# Altium PCB analogtestboard.PCBDOC (part 1 of 2)
Units mil, origin at the board's own origin, x right, y up, seen from the top; angles counter-clockwise.
Board outline 5890 x 8500 mil, 4 copper layers (Top Layer, Internal Plane 1, Internal Plane 2, Bottom Layer); 292 components, 170 nets, 943 pads, 238 vias.
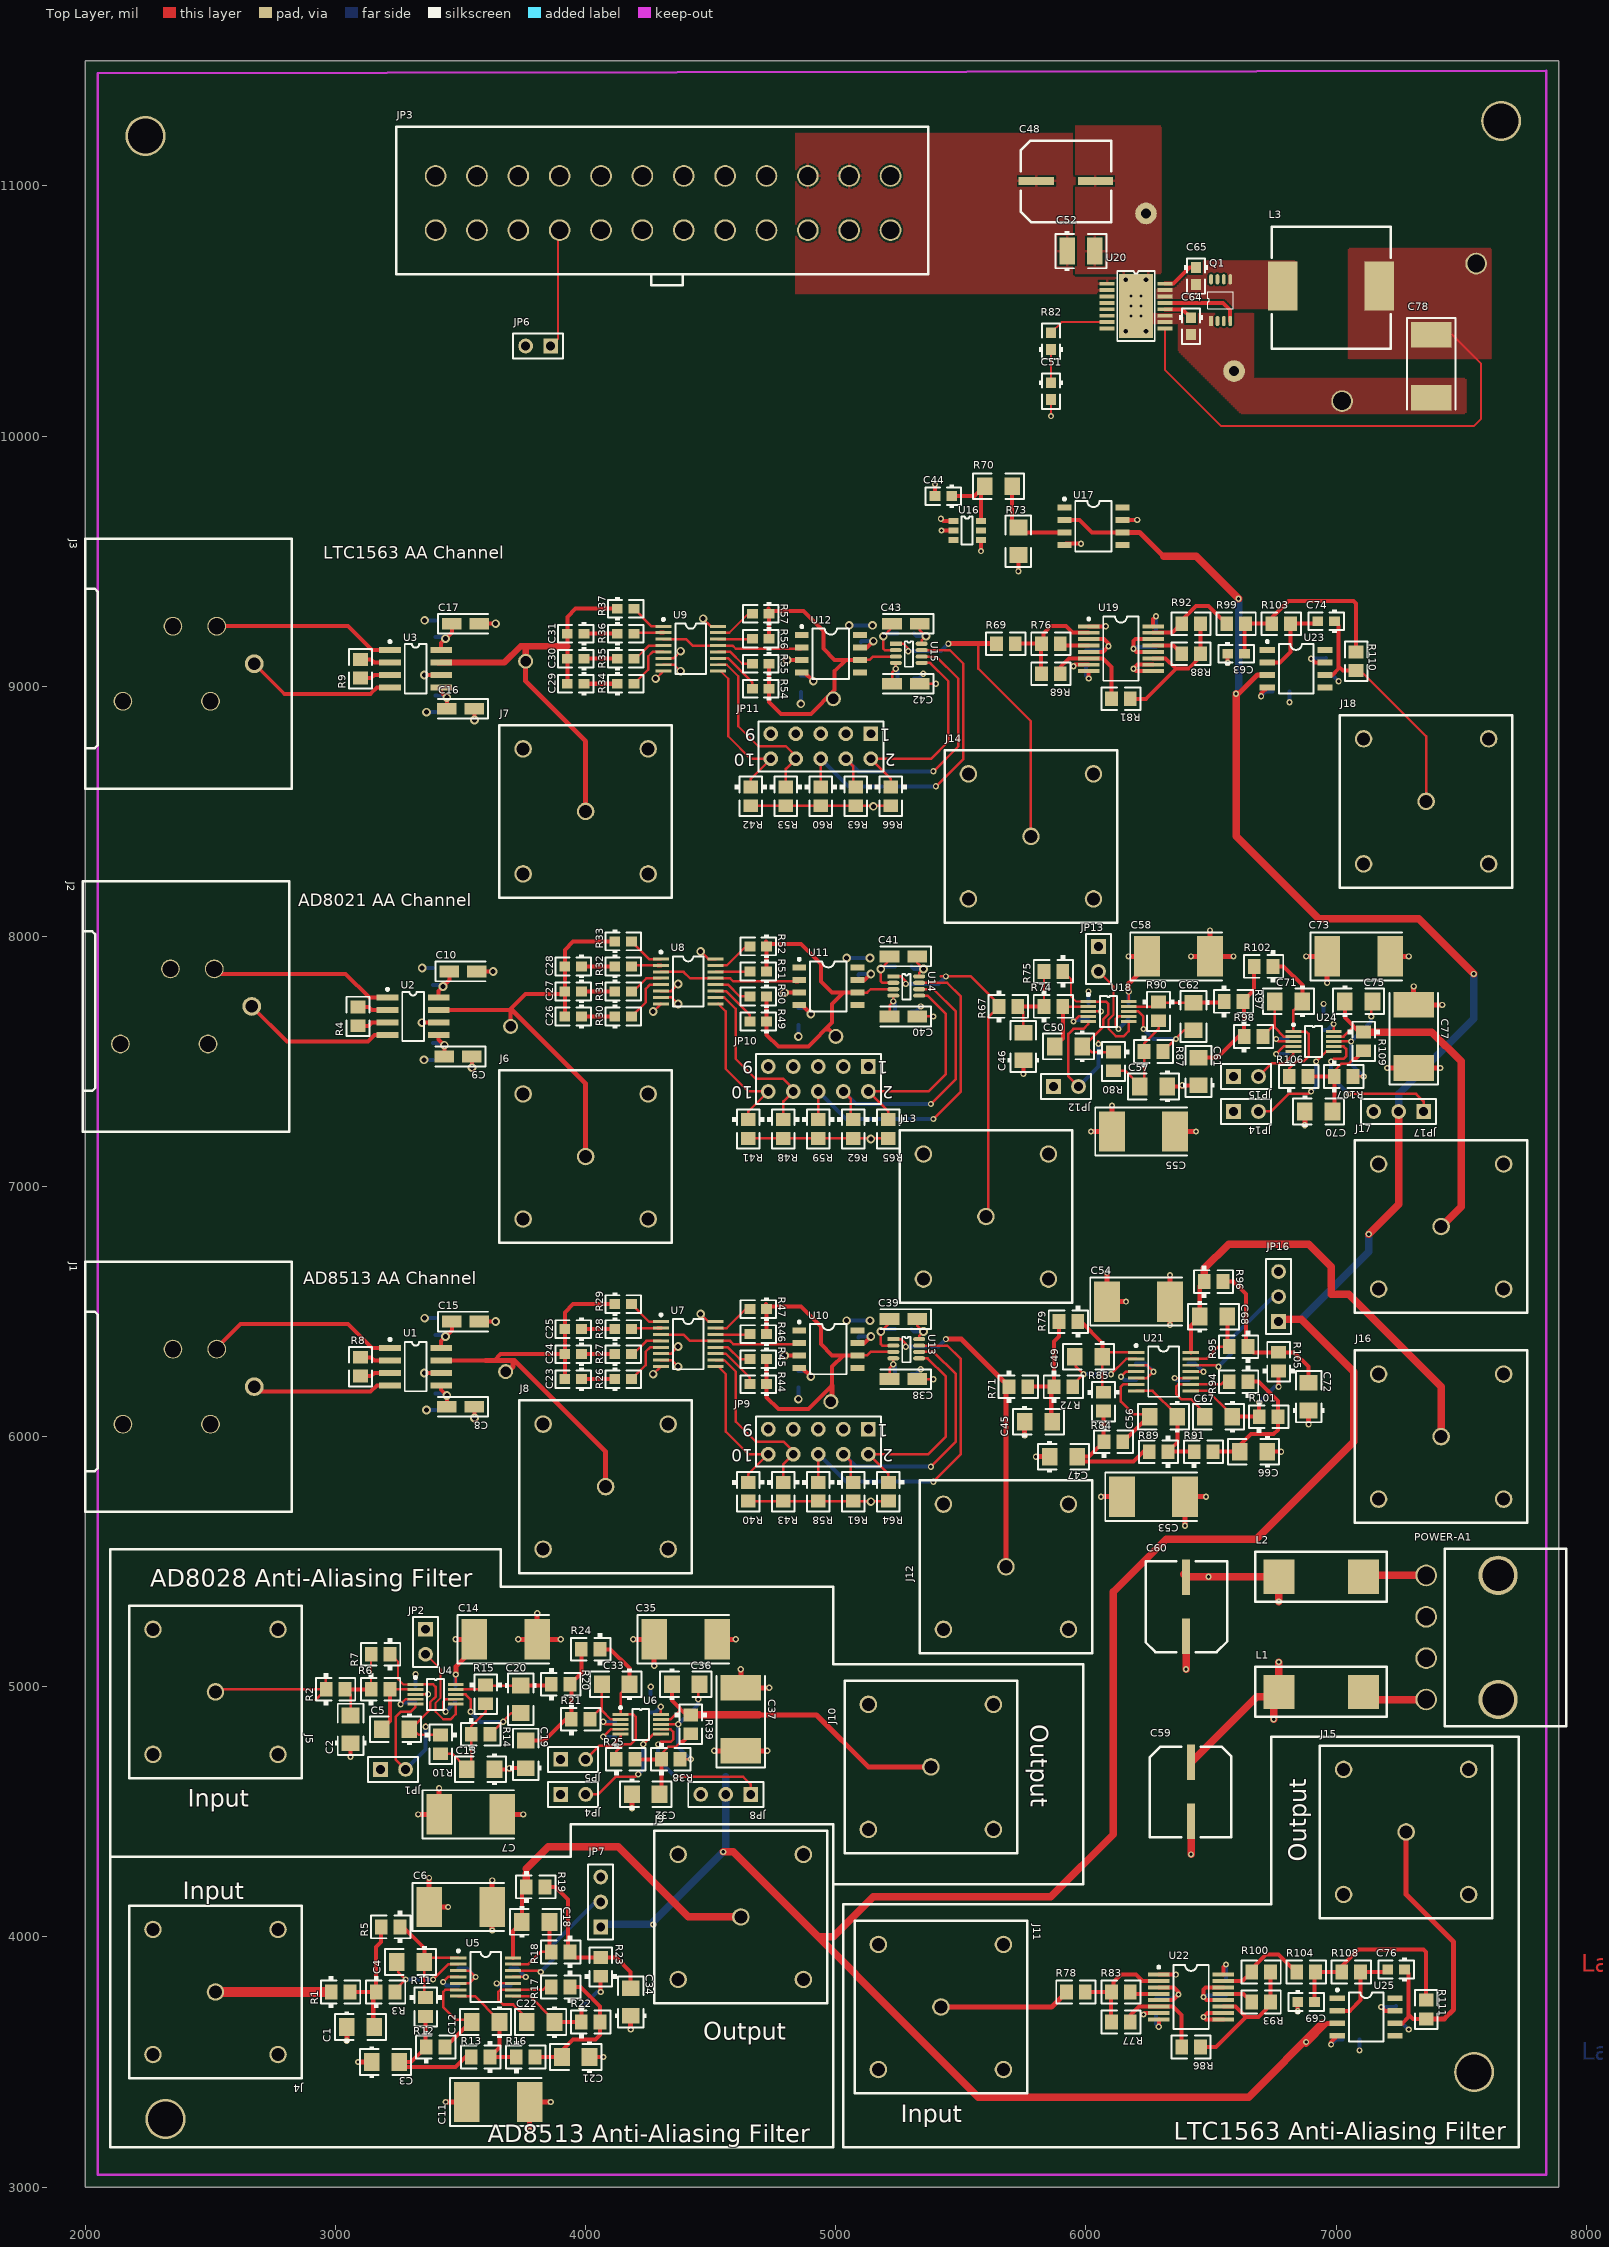
[diagram p0: Top Layer view]
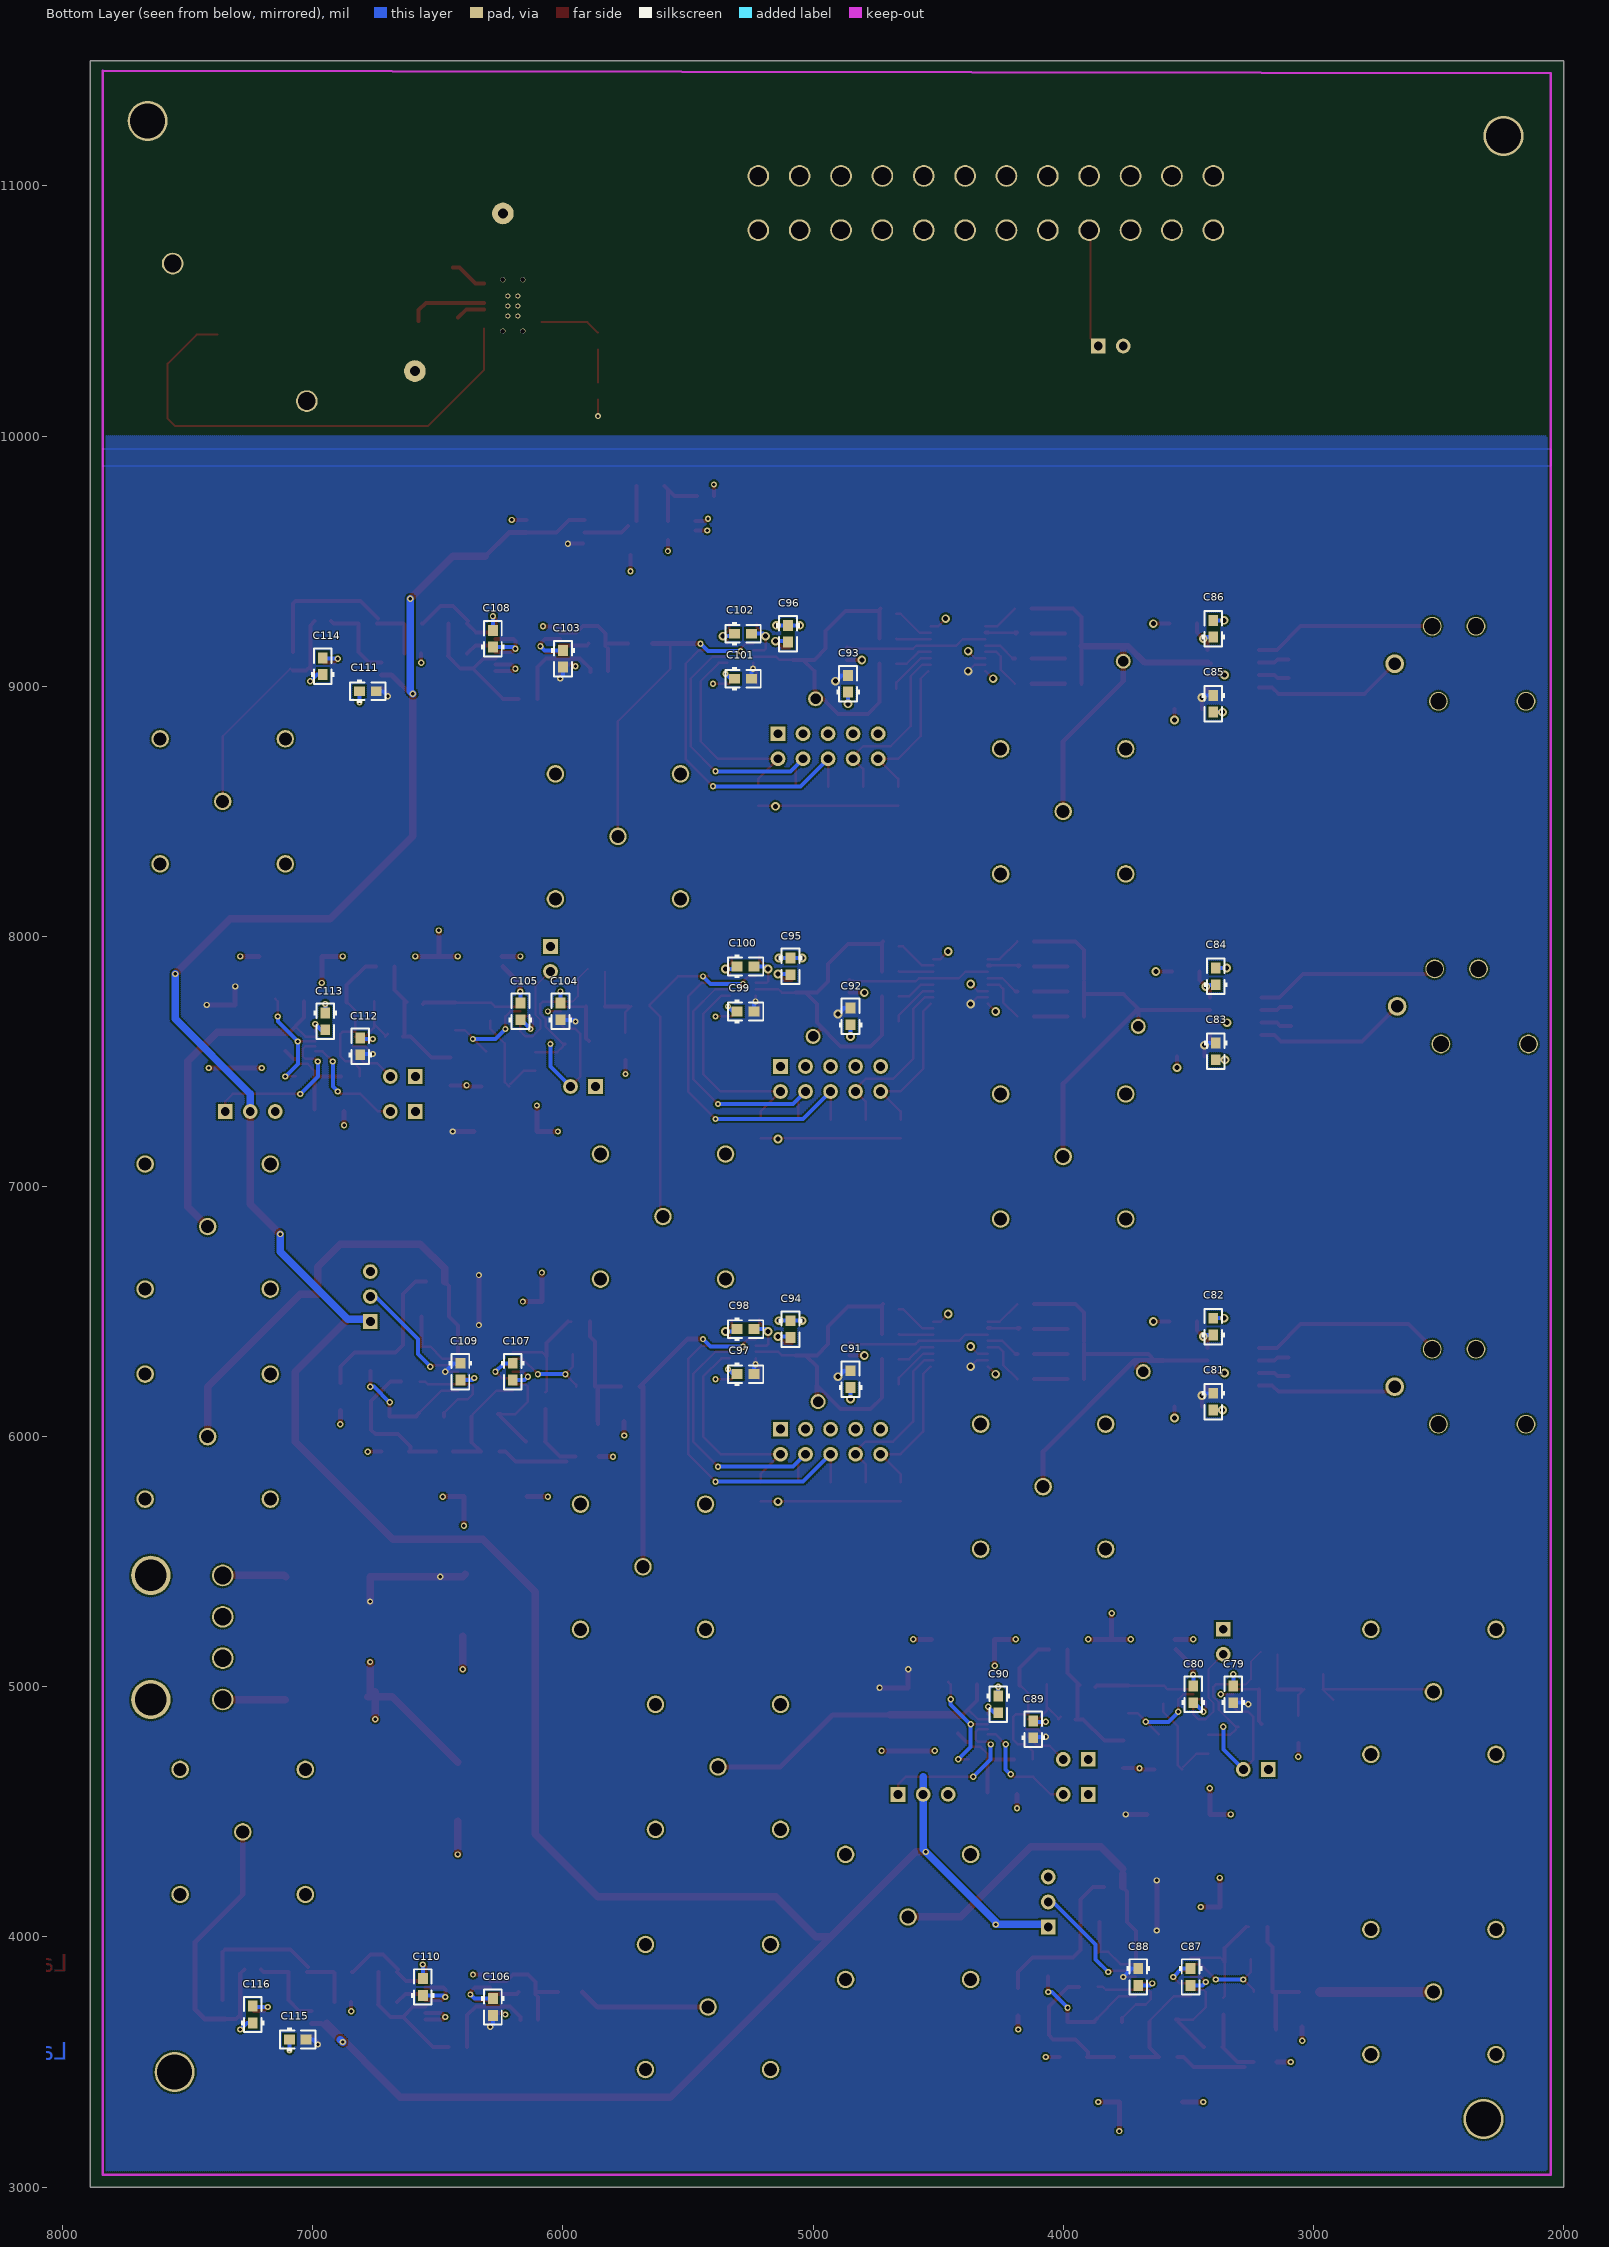
[diagram p1: Bottom Layer view, seen from below]
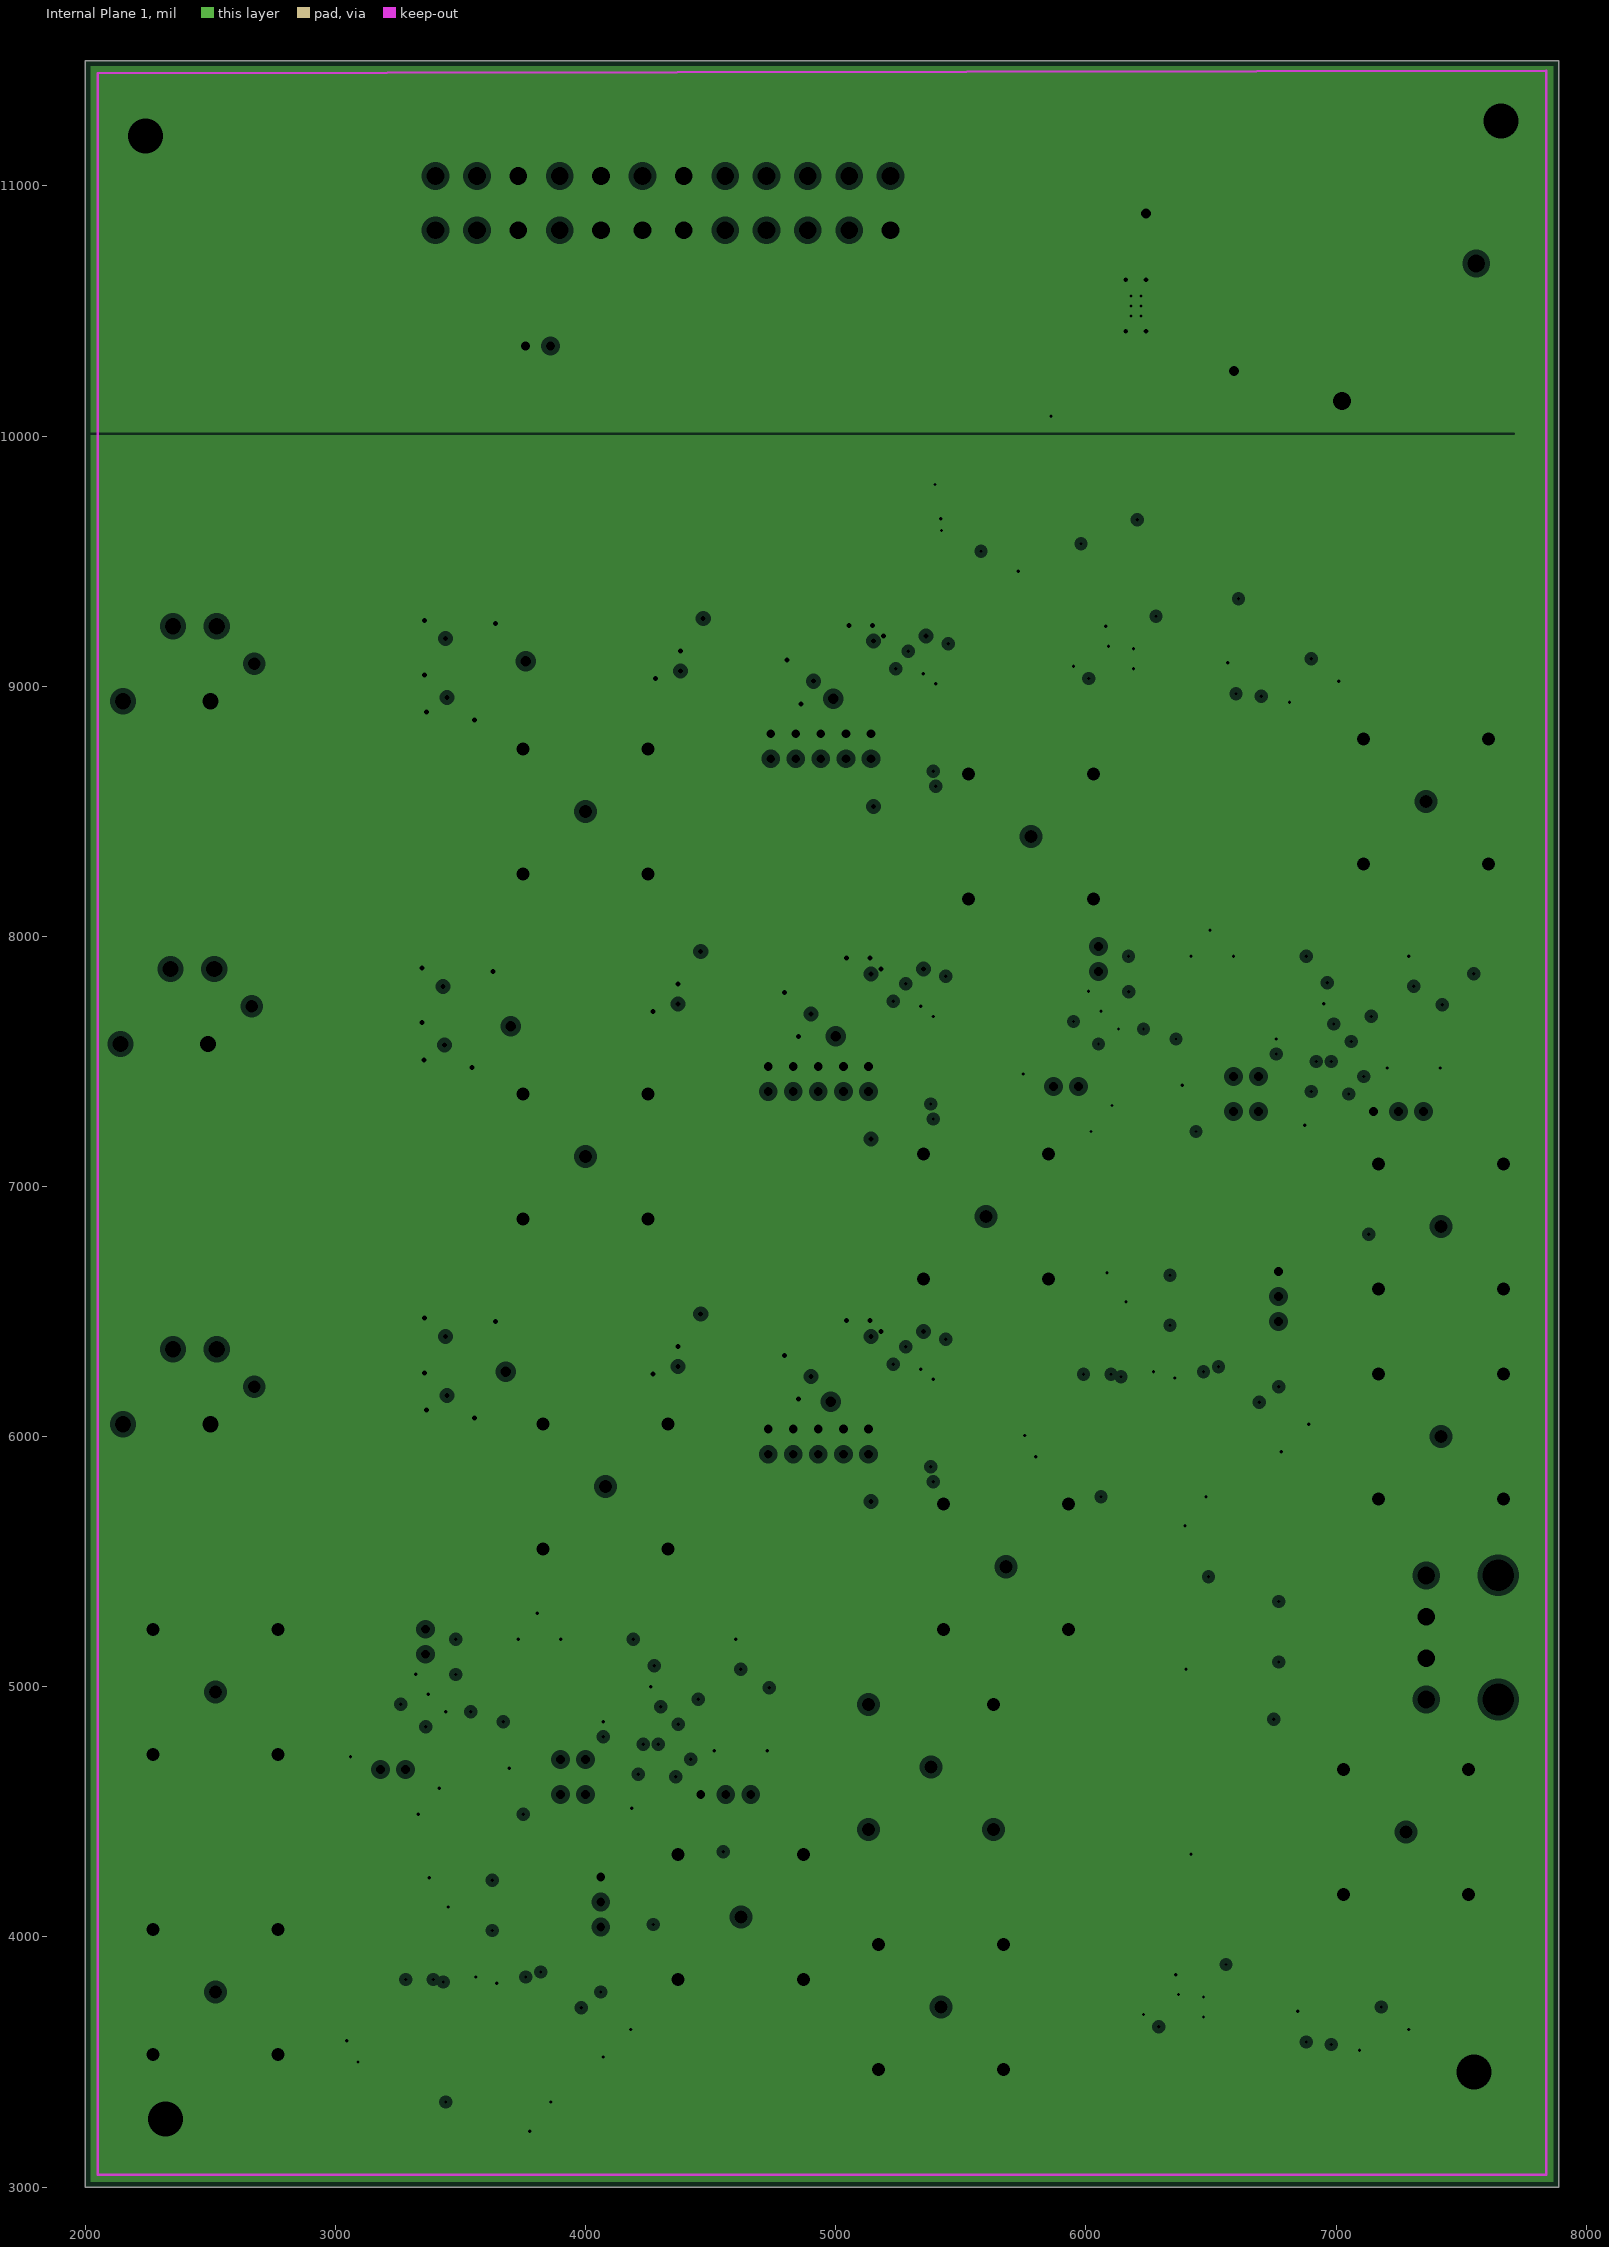
[diagram p2: Internal Plane 1, clearances drawn from the general rule]
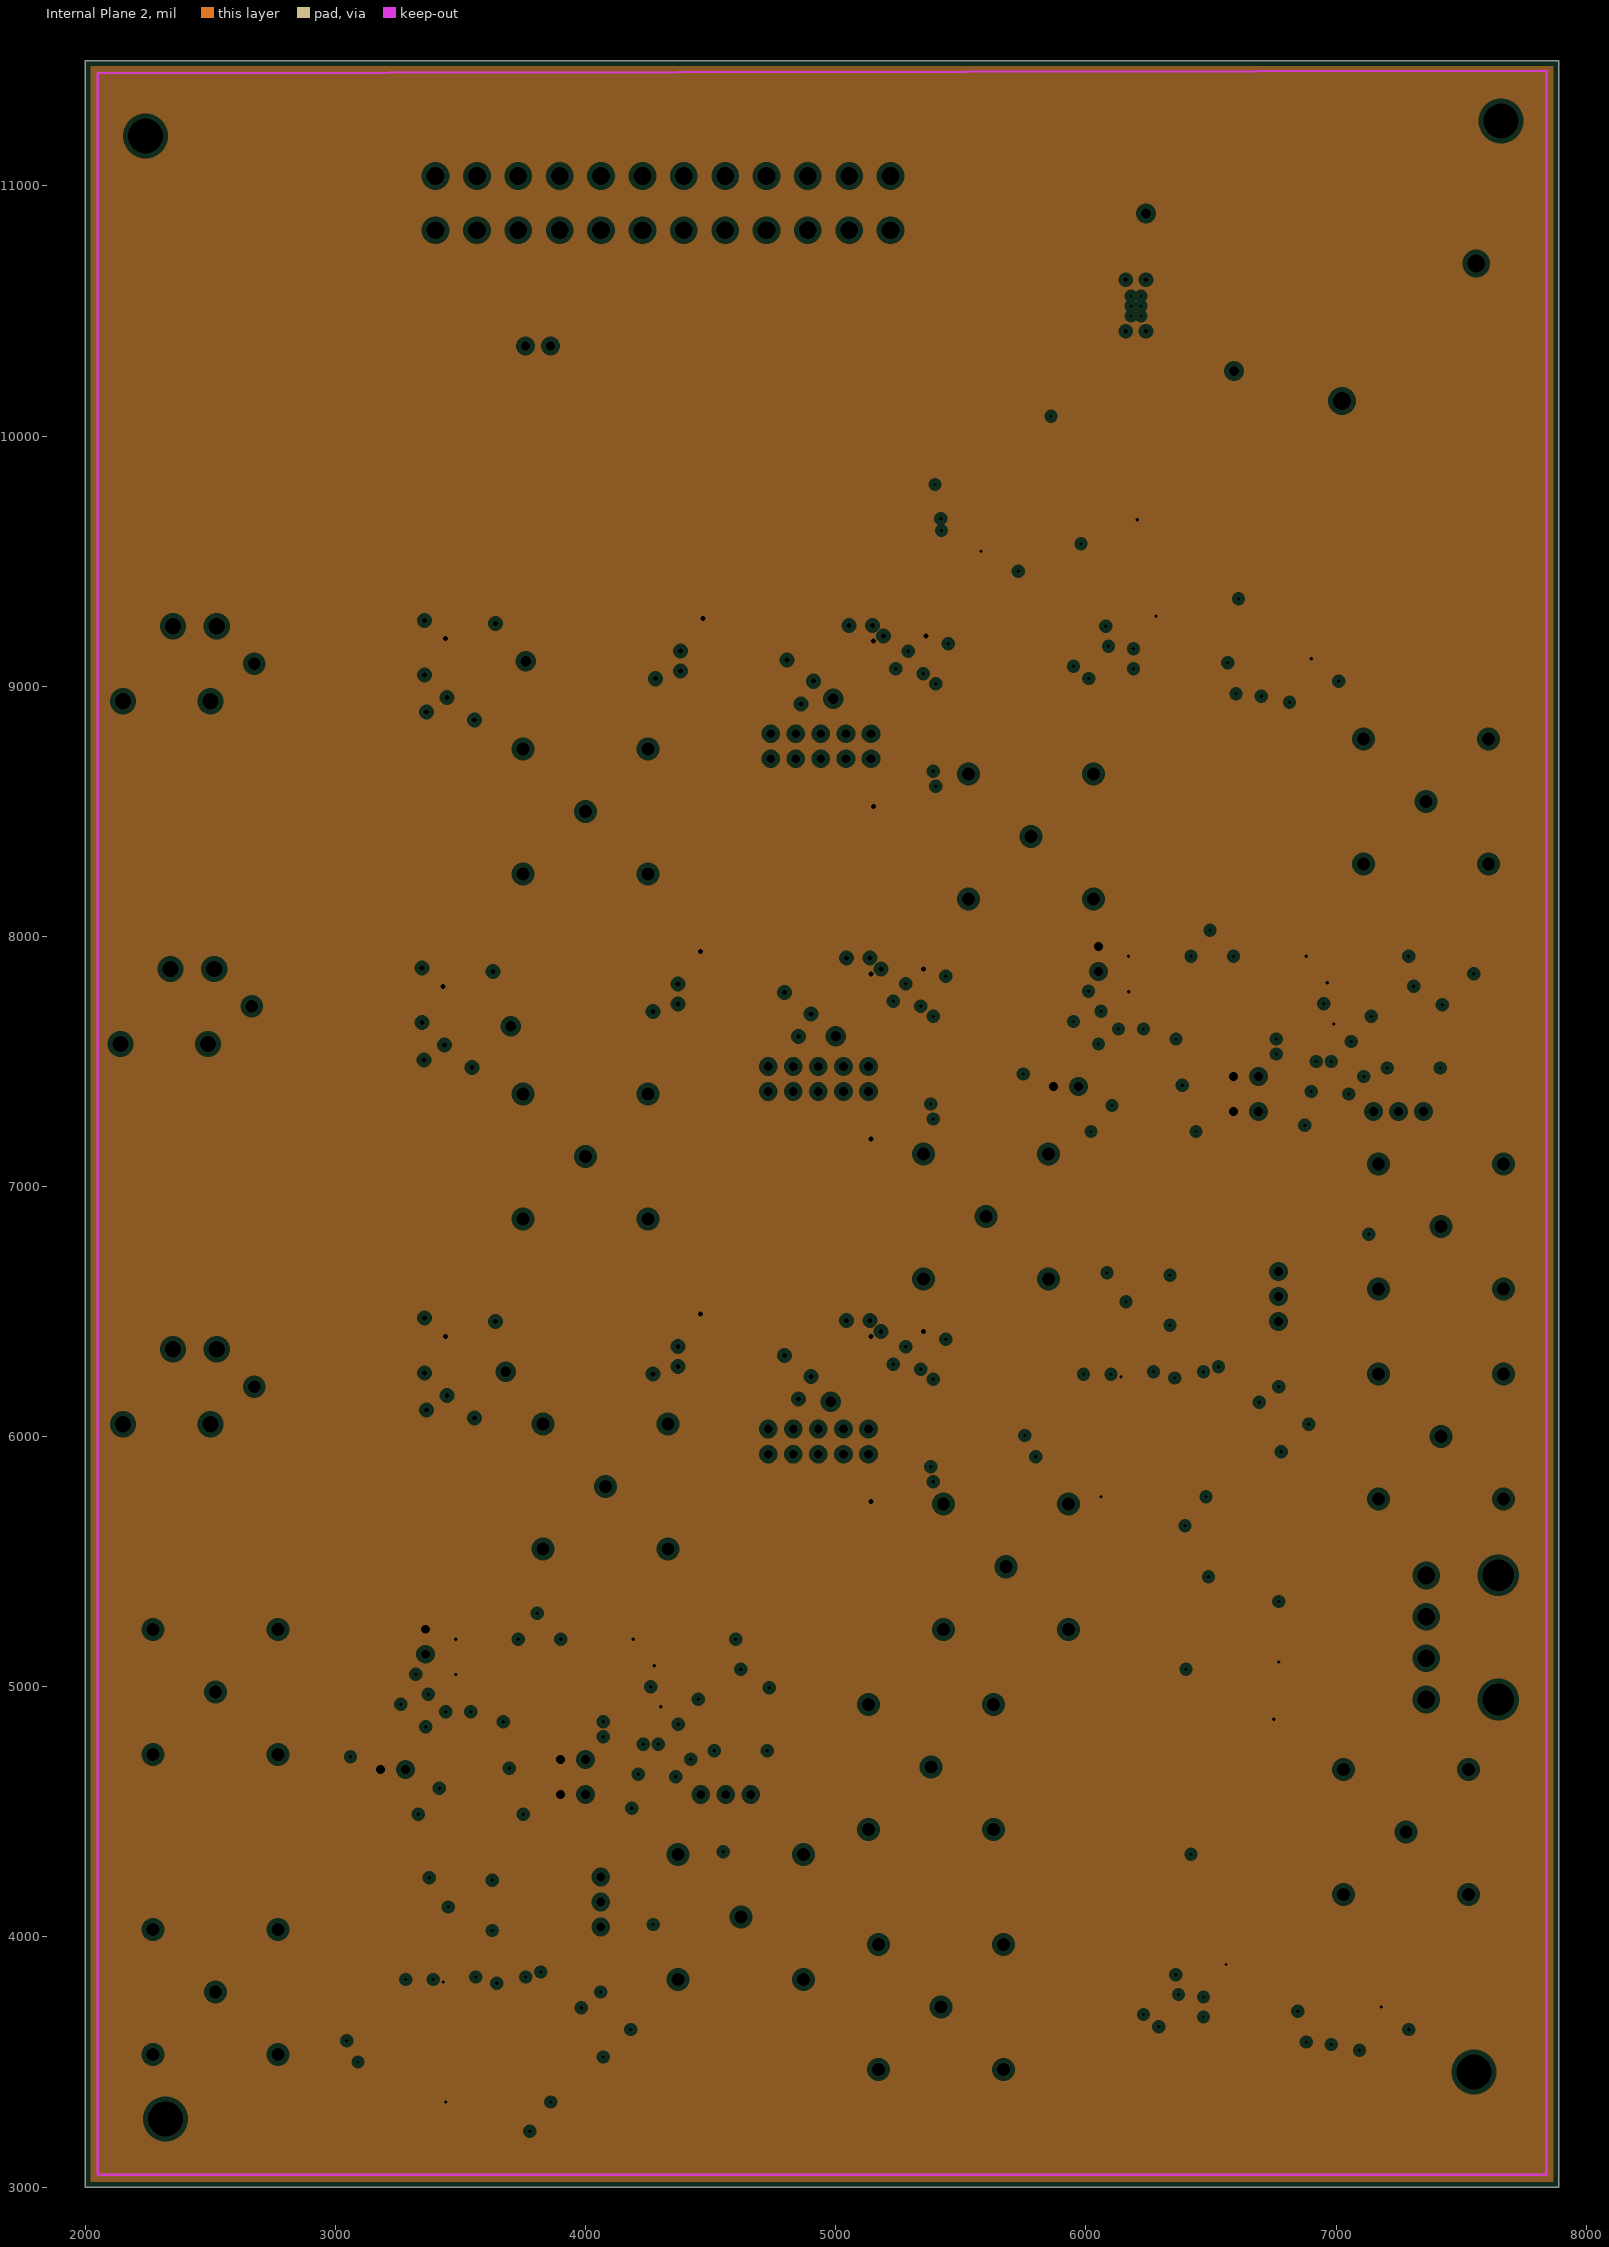
[diagram p3: Internal Plane 2, clearances drawn from the general rule]

## Layer stack, top to bottom
Top Layer: signal copper 1.4
Dielectric: core 12.6, FR-4, Dk 4.8
Internal Plane 1: plane copper 1.4, net GND
Dielectric: prepreg 12.6, FR-4, Dk 4.8
Internal Plane 2: plane copper 1.4, net AVDD
Dielectric: core 12.6, FR-4, Dk 4.8
Bottom Layer: signal copper 1.4

## Board outline
2000,3000 7890,3000 7890,11500 2000,11500

## Design rules (kind name [scope] priority, off if disabled: settings)
Clearance [All] p1: gap=7
ComponentClearance [All] p1: gap=10 collisioncheckmode=0
HoleSize [All] p1: absolutevalues=TRUE maxlimit=180 minlimit=13.5 maxpercent=80.000 minpercent=20.000
PlaneClearance [All] p1: clearance=20
PlaneConnect [All] p1: planeconnectstyle=Relief reliefexpansion=20 reliefentries=4 reliefconductorwidth=10 reliefairgap=10
PolygonConnect [All] p1: connectstyle=Direct reliefconductorwidth=30 reliefentries=4 polygonreliefangle="45 Angle"
RoomDefinition power [InComponentClass('power')] p1: confinementstyle=ConfineIn formatcopy=TRUE outline 3090,10050 7780,10050 7780,11370 3090,11370
RoomDefinition aa80281 [InComponentClass('aa80281')] p2: confinementstyle=ConfineIn formatcopy=TRUE outline 5590,7100 7470,7100 7470,8050 5590,8050
RoomDefinition AA85131 [InComponentClass('AA85131')] p3: confinementstyle=ConfineIn formatcopy=TRUE outline 5600,5630 7010,5630 7010,6730 5600,6730
RoomDefinition AA85132 [InComponentClass('AA85132')] p4: confinementstyle=ConfineIn formatcopy=TRUE outline 2890,3210 4300,3210 4300,4310 2890,4310
RoomDefinition PGA1 [InComponentClass('PGA1')] p5: confinementstyle=ConfineIn formatcopy=TRUE outline 3820,8440 5550,8440 5550,9370 3820,9370
RoomDefinition PGA2 [InComponentClass('PGA2')] p6: confinementstyle=ConfineIn formatcopy=TRUE outline 3810,5660 5540,5660 5540,6590 3810,6590
RoomDefinition PGA3 [InComponentClass('PGA3')] p7: confinementstyle=ConfineIn formatcopy=TRUE outline 3810,7110 5540,7110 5540,8040 3810,8040
RoomDefinition aa80282 [InComponentClass('aa80282')] p8: confinementstyle=ConfineIn formatcopy=TRUE outline 2900,4370 4780,4370 4780,5320 2900,5320
RoomDefinition aafilter1 [InComponentClass('aafilter1')] p9: confinementstyle=ConfineIn formatcopy=TRUE outline 5570,8850 7160,8850 7160,9360 5570,9360
RoomDefinition aafilter2 [InComponentClass('aafilter2')] p10: confinementstyle=ConfineIn formatcopy=TRUE outline 5850,3460 7440,3460 7440,3970 5850,3970
RoomDefinition input1 [InComponentClass('input1')] p11: confinementstyle=ConfineIn formatcopy=TRUE outline 3000,8790 3780,8790 3780,9330 3000,9330
RoomDefinition input2 [InComponentClass('input2')] p12: confinementstyle=ConfineIn formatcopy=TRUE outline 2990,7400 3770,7400 3770,7940 2990,7940
RoomDefinition input3 [InComponentClass('input3')] p13: confinementstyle=ConfineIn formatcopy=TRUE outline 3000,6000 3780,6000 3780,6540 3000,6540
RoomDefinition main [InComponentClass('main')] p14: confinementstyle=ConfineIn formatcopy=TRUE outline 7940,3120 8420,3120 8420,4260 7940,4260
RoutingLayers [All] p1: top layer=Horizontal bottom layer=Vertical
RoutingVias [All] p1: holewidth=13.5 width=25 viastyle="Through Hole" minholewidth=13.5 minwidth=25 maxholewidth=28 maxwidth=50
SolderMaskExpansion [All] p1: expansion=4
TestPointUsage [All] p1: valid=0 allowmultiple=FALSE
Testpoint [All] p1: side=15 testpointundercomponent=TRUE minsize=40 maxsize=100 preferedsize=60 minholesize=0 maxholesize=40 preferedholesize=32 testpointgrid=1 style=1023 order=-539222988
Width [All] p1: maxlimit=100 minlimit=8 preferedwidth=8 bottomlayer_prefwidth=30 minimp=50.000000 maximp=50.000000 favimp=50.000000
13 further rules are at their usual default settings.

## Classes and differential pairs
component class power: C48 C51 C52 C64 C65 C78 JP3 JP6 L3 Q1 R82 U20
channel class input: input1 input2 input3
channel class aafilter: aafilter1 aafilter2
channel class aa8028: aa80281 aa80282
channel class PGA: PGA1 PGA2 PGA3
channel class AA8513: AA85131 AA85132
component class main: C44 C52 C54 C55 C59 C60 J1 J2 J3 J4 J5 J6 J7 J8 J9 J10 J11 J12 J13 J14 J15 J16 J17 J18 L1 L2 POWER-A1 R70 R73 U16 U17
component class input3: C8 C15 C81 C82 R8 U1
component class input2: C9 C10 C83 C84 R4 U2
component class input1: C16 C17 C85 C86 R9 U3
component class aafilter2: C69 C76 C106 C110 C115 C116 R77 R78 R83 R86 R93 R100 R104 R108 R111 U22 U25
component class aafilter1: C63 C74 C103 C108 C111 C114 R68 R69 R76 R81 R88 R92 R99 R103 R110 U19 U23
component class aa80282: C2 C5 C7 C13 C14 C19 C20 C32 C33 C35 C36 C37 C79 C80 C89 C90 JP1 JP2 JP4 JP5 JP8 R2 R6 R7 R10 R14 R15 R20 R21 R24 R25 R38 R39 U4 U6
component class aa80281: C46 C50 C55 C57 C58 C61 C62 C70 C71 C73 C75 C77 C104 C105 C112 C113 JP12 JP13 JP14 JP15 JP17 R67 R74 R75 R80 R87 R90 R97 R98 R102 R106 R107 R109 U18 U24
component class PGA3: C26 C27 C28 C40 C41 C92 C95 C99 C100 JP10 R30 R31 R32 R33 R41 R48 R49 R50 R51 R52 R59 R62 R65 U8 U11 U14
component class PGA2: C23 C24 C25 C38 C39 C91 C94 C97 C98 JP9 R26 R27 R28 R29 R40 R43 R44 R45 R46 R47 R58 R61 R64 U7 U10 U13
component class PGA1: C29 C30 C31 C42 C43 C93 C96 C101 C102 JP11 R34 R35 R36 R37 R42 R53 R54 R55 R56 R57 R60 R63 R66 U9 U12 U15
component class AA85132: C1 C3 C4 C6 C10_AA85132 C11 C12 C12_AA85132 C13_AA85132 C16_AA85132 C18 C21 C22 C34 C87 C88 JP7 R1 R3 R5 R11 R12 R13 R16 R17 R18 R19 R22 R23 U5
component class AA85131: C10_AA85131 C12_AA85131 C13_AA85131 C16_AA85131 C45 C47 C49 C53 C54 C56 C66 C67 C68 C72 C107 C109 JP16 R71 R72 R79 R84 R85 R89 R91 R94 R95 R96 R101 R105 U21

## Components (designator, comment, footprint, x,y, rotation, side; value= is the part's Value field where it differs from the comment)
C1 "Cap" CC3216-1206 3100,3640 r0 top (schematic designator C5)
C2 "Cap" CC3216-1206 3060,4830 r90 top (schematic designator C30)
C3 "Cap" CC3216-1206 3200,3500 r0 top (schematic designator C6)
C4 "Cap" CC3216-1206 3300,3900.01 r180 top (schematic designator C1)
C5 "Cap" CC3216-1206 3240,4830 r180 top (schematic designator C26)
C6 "Cap Pol1" TC7360-2924 3500,4120 r0 top (schematic designator C15)
C7 "Cap Pol1" TC7360-2924 3540,4490 r0 top (schematic designator C40)
C8 "Cap Pol3" TC3216-1206 3500,6120 r180 top (schematic designator C51)
C9 "Cap Pol3" TC3216-1206 3490,7520 r180 top (schematic designator C51)
C10 "Cap Pol3" TC3216-1206 3510,7860 r0 top (schematic designator C50)
C11 "Cap Pol1" TC7360-2924 3650,3340 r0 top (schematic designator C14)
C12 "Cap" CC3216-1206 3600,3660 r180 top (schematic designator C2)
C13 "Cap" CC3216-1206 3580,4670 r180 top (schematic designator C31)
C14 "Cap Pol1" TC7360-2924 3680,5190 r0 top (schematic designator C39)
C15 "Cap Pol3" TC3216-1206 3520,6460 r0 top (schematic designator C50)
C16 "Cap Pol3" TC3216-1206 3500,8910 r180 top (schematic designator C51)
C17 "Cap Pol3" TC3216-1206 3520,9250 r0 top (schematic designator C50)
C18 "Cap" CC3216-1206 3800,4060 r0 top (schematic designator C4)
C19 "Cap" CC3216-1206 3760,4730 r90 top (schematic designator C32)
C20 "Cap" CC3216-1206 3739.98,4950 r270 top (schematic designator C27)
C21 "Cap" CC3216-1206 3960,3520.01 r180 top (schematic designator C7)
C22 "Cap" CC3216-1206 3820,3660 r180 top (schematic designator C3)
C23 "Cap" CC1608-0603 3950,6230 r180 top (schematic designator C19)
C24 "Cap" CC1608-0603 3950,6330 r180 top (schematic designator C23)
C25 "Cap" CC1608-0603 3950,6430 r180 top (schematic designator C21)
C26 "Cap" CC1608-0603 3950,7680 r180 top (schematic designator C19)
C27 "Cap" CC1608-0603 3950,7780 r180 top (schematic designator C23)
C28 "Cap" CC1608-0603 3950,7880 r180 top (schematic designator C21)
C29 "Cap" CC1608-0603 3960,9010 r180 top (schematic designator C19)
C30 "Cap" CC1608-0603 3960,9110 r180 top (schematic designator C23)
C31 "Cap" CC1608-0603 3960,9210 r180 top (schematic designator C21)
C32 "Cap" CC3216-1206 4240,4570 r0 top (schematic designator C33)
C33 "Cap" CC3216-1206 4120,5010 r180 top (schematic designator C28)
C34 "Cap" CC3216-1206 4180,3740 r90 top (schematic designator C8)
C35 "Cap Pol1" TC7360-2924 4400,5190 r0 top (schematic designator C38)
C36 "Cap" CC3216-1206 4400,5010 r0 top (schematic designator C29)
C37 "Cap Pol1" TC7360-2924 4620,4870 r90 top (schematic designator C41)
C38 "Tantalum" TC3216-1206 5270,6230 r180 top (schematic designator C25)
C39 "Tantalum" TC3216-1206 5270,6470 r180 top (schematic designator C24)
C40 "Tantalum" TC3216-1206 5270,7680 r180 top (schematic designator C25)
C41 "Tantalum" TC3216-1206 5270,7920 r180 top (schematic designator C24)
C42 "Tantalum" TC3216-1206 5280,9010 r180 top (schematic designator C25)
C43 "Tantalum" TC3216-1206 5280,9250 r180 top (schematic designator C24)
C44 "Cap" CC1608-0603 5430,9760 r180 top (schematic designator C53)
C45 "Cap" CC3216-1206 5810,6060 r0 top (schematic designator C5)
C46 "Cap" CC3216-1206 5750,7560 r90 top (schematic designator C30)
C47 "Cap" CC3216-1206 5910,5920 r0 top (schematic designator C6)
C48 "EEVFK1C152Q" PanasonicE 5920,11020 r180 top (schematic designator C61)
C49 "Cap" CC3216-1206 6010,6320 r180 top (schematic designator C1)
C50 "Cap" CC3216-1206 5930,7560 r180 top (schematic designator C26)
C51 "Cap" CC1608-0603 5860,10180 r270 top (schematic designator C60)
C52 "C3225X5R1C106M" CC3225-1210 5980,10740 r0 top (schematic designator C62)
C53 "Cap Pol1" TC7360-2924 6270,5760 r0 top (schematic designator C14)
C54 "Cap Pol1" TC7360-2924 6210,6540 r0 top (schematic designator C15)
C55 "Cap Pol1" TC7360-2924 6230,7220 r0 top (schematic designator C40)
C56 "Cap" CC3216-1206 6310,6080 r180 top (schematic designator C2)
C57 "Cap" CC3216-1206 6270,7400 r180 top (schematic designator C31)
C58 "Cap Pol1" TC7360-2924 6370,7920 r0 top (schematic designator C39)
C59 "" PanasonicE 6420,4580 r90 top (schematic designator C56)
C60 "" PanasonicE 6400,5320 r270 top (schematic designator C57)
C61 "Cap" CC3216-1206 6450,7460 r90 top (schematic designator C32)
C62 "Cap" CC3216-1206 6429.98,7680 r270 top (schematic designator C27)
C63 "Cap" CC1608-0603 6600,9130 r0 top (schematic designator C45)
C64 "Cap" CC1608-0603 6420,10440 r270 top (schematic designator C59)
C65 "Cap" CC1608-0603 6440,10640 r270 top (schematic designator C58)
C66 "Cap" CC3216-1206 6670,5940 r180 top (schematic designator C7)
C67 "Cap" CC3216-1206 6530,6080 r180 top (schematic designator C3)
C68 "Cap" CC3216-1206 6510,6480 r0 top (schematic designator C4)
C69 "Cap" CC1608-0603 6880,3740 r0 top (schematic designator C45)
C70 "Cap" CC3216-1206 6930,7300 r0 top (schematic designator C33)
C71 "Cap" CC3216-1206 6810,7740 r180 top (schematic designator C28)
C72 "Cap" CC3216-1206 6890,6160 r90 top (schematic designator C8)
C73 "Cap Pol1" TC7360-2924 7090,7920 r0 top (schematic designator C38)
C74 "Cap" CC1608-0603 6960,9260 r180 top (schematic designator C43)
C75 "Cap" CC3216-1206 7090,7740 r0 top (schematic designator C29)
C76 "Cap" CC1608-0603 7240,3870 r180 top (schematic designator C43)
C77 "Cap Pol1" TC7360-2924 7310,7600 r90 top (schematic designator C41)
C78 "TPSD107M010R0100" TC7360-2924 7380,10280 r270 top (schematic designator C63)
C79 "Cap" CC1608-0603 3320,4970 r90 bottom (schematic designator C36)
C80 "Cap" CC1608-0603 3480,4970 r90 bottom (schematic designator C34)
C81 "Cap" CC1608-0603 3400,6140 r270 bottom (schematic designator C49)
C82 "Cap" CC1608-0603 3400,6440 r90 bottom (schematic designator C48)
C83 "Cap" CC1608-0603 3390,7540 r270 bottom (schematic designator C49)
C84 "Cap" CC1608-0603 3390,7840 r90 bottom (schematic designator C48)
C85 "Cap" CC1608-0603 3400,8930 r270 bottom (schematic designator C49)
C86 "Cap" CC1608-0603 3400,9230 r90 bottom (schematic designator C48)
C87 "Cap" CC1608-0603 3490.75,3840 r270 bottom (schematic designator C9)
C88 "Cap" CC1608-0603 3700,3840 r270 bottom (schematic designator C11)
C89 "Cap" CC1608-0603 4120,4830 r90 bottom (schematic designator C37)
C90 "Cap" CC1608-0603 4260,4930 r270 bottom (schematic designator C35)
C91 "Cap" CC1608-0603 4850,6230 r90 bottom (schematic designator C20)
C92 "Cap" CC1608-0603 4850,7680 r90 bottom (schematic designator C20)
C93 "Cap" CC1608-0603 4860,9010 r90 bottom (schematic designator C20)
C94 "Cap" CC1608-0603 5090,6430 r270 bottom (schematic designator C18)
C95 "Cap" CC1608-0603 5090,7880 r270 bottom (schematic designator C18)
C96 "Cap" CC1608-0603 5100,9210 r270 bottom (schematic designator C18)
C97 "Cap" CC1608-0603 5270,6250 r180 bottom (schematic designator C22)
C98 "Cap" CC1608-0603 5270,6430 r180 bottom (schematic designator C17)
C99 "Cap" CC1608-0603 5270,7700 r180 bottom (schematic designator C22)
C100 "Cap" CC1608-0603 5270,7880 r180 bottom (schematic designator C17)
C101 "Cap" CC1608-0603 5280,9030 r180 bottom (schematic designator C22)
C102 "Cap" CC1608-0603 5280,9210 r180 bottom (schematic designator C17)
C103 "Cap" CC1608-0603 6000,9110 r270 bottom (schematic designator C47)
C104 "Cap" CC1608-0603 6010,7700 r90 bottom (schematic designator C36)
C105 "Cap" CC1608-0603 6170,7700 r90 bottom (schematic designator C34)
C106 "Cap" CC1608-0603 6280,3720 r270 bottom (schematic designator C47)
C107 "Cap" CC1608-0603 6200.75,6260 r270 bottom (schematic designator C9)
C108 "Cap" CC1608-0603 6280,9190 r90 bottom (schematic designator C44)
C109 "Cap" CC1608-0603 6410,6260 r270 bottom (schematic designator C11)
C110 "Cap" CC1608-0603 6560,3800 r90 bottom (schematic designator C44)
C111 "Cap" CC1608-0603 6780,8980 r180 bottom (schematic designator C46)
C112 "Cap" CC1608-0603 6810,7560 r90 bottom (schematic designator C37)
C113 "Cap" CC1608-0603 6950,7660 r270 bottom (schematic designator C35)
C114 "Cap" CC1608-0603 6960,9080 r90 bottom (schematic designator C42)
C115 "Cap" CC1608-0603 7060,3590 r180 bottom (schematic designator C46)
C116 "Cap" CC1608-0603 7240,3690 r90 bottom (schematic designator C42)
J1 "XLR connector" NC3FAH-0 2000,6200 r90 top (schematic designator J2)
J2 "XLR connector" NC3FAH-0 1990,7720 r90 top (schematic designator J1)
J3 "XLR connector" NC3FAH-0 2000,9090 r90 top
J4 "Vertical BNC" "Vertical BNC 227699-1" 2520,3780 r0 top (schematic designator J15)
J5 "Vertical BNC" "Vertical BNC 227699-1" 2520,4980 r0 top (schematic designator J13)
J6 "Vertical BNC" "Vertical BNC 227699-1" 4000,7120 r0 top (schematic designator J5)
J7 "Vertical BNC" "Vertical BNC 227699-1" 4000,8500 r0 top (schematic designator J12)
J8 "Vertical BNC" "Vertical BNC 227699-1" 4080,5800 r0 top (schematic designator J9)
J9 "Vertical BNC" "Vertical BNC 227699-1" 4620,4080 r0 top (schematic designator J16)
J10 "Vertical BNC" "Vertical BNC 227699-1" 5380,4680 r0 top (schematic designator J14)
J11 "Vertical BNC" "Vertical BNC 227699-1" 5420,3720 r0 top (schematic designator J17)
J12 "Vertical BNC" "Vertical BNC 227699-1" 5680,5480 r0 top (schematic designator J8)
J13 "Vertical BNC" "Vertical BNC 227699-1" 5600,6880 r0 top (schematic designator J6)
J14 "Vertical BNC" "Vertical BNC 227699-1" 5780,8400 r0 top (schematic designator J11)
J15 "Vertical BNC" "Vertical BNC 227699-1" 7280,4420 r0 top (schematic designator J18)
J16 "Vertical BNC" "Vertical BNC 227699-1" 7420,6000 r0 top (schematic designator J7)
J17 "Vertical BNC" "Vertical BNC 227699-1" 7420,6840 r0 top (schematic designator J4)
J18 "Vertical BNC" "Vertical BNC 227699-1" 7360,8540 r0 top (schematic designator J10)
JP1 "Header 2" HDR1X2 3180,4670 r0 top (schematic designator JP4)
JP2 "Header 2" HDR1X2 3360,5230 r270 top (schematic designator JP5)
JP3 "Header 24" "SFX-POWER 39-28-1243" 3400,11040 r0 top (schematic designator JP12)
JP4 "Header 2" HDR1X2 3900,4570 r0 top (schematic designator JP7)
JP5 "Header 2" HDR1X2 3900,4710 r0 top (schematic designator JP6)
JP6 "Header 2" HDR1X2 3860,10360 r180 top (schematic designator JP13)
JP7 "Header 3" HDR1X3 4060,4040 r90 top (schematic designator JP1)
JP8 "Header 3" HDR1X3 4660,4570 r180 top (schematic designator JP3)
JP9 "Header 5X2" HDR2X5 5130,6030 r180 top (schematic designator JP2)
JP10 "Header 5X2" HDR2X5 5130,7480 r180 top (schematic designator JP2)
JP11 "Header 5X2" HDR2X5 5140,8810 r180 top (schematic designator JP2)
JP12 "Header 2" HDR1X2 5870,7400 r0 top (schematic designator JP4)
JP13 "Header 2" HDR1X2 6050,7960 r270 top (schematic designator JP5)
JP14 "Header 2" HDR1X2 6590,7300 r0 top (schematic designator JP7)
JP15 "Header 2" HDR1X2 6590,7440 r0 top (schematic designator JP6)
JP16 "Header 3" HDR1X3 6770,6460 r90 top (schematic designator JP1)
JP17 "Header 3" HDR1X3 7350,7300 r180 top (schematic designator JP3)
L1 "Inductor 28F0121-1SR" STEWARD_1SR 6940,4980 r180 top
L2 "Inductor 28F0121-1SR" STEWARD_1SR 6940,5440 r180 top
L3 "CDRH127-220" "SUMIDA Inductor" 6980,10600 r90 top
POWER-A1 "Molex 39-30-3045" MJ4RTHR 7360,5280 r90 top
Q1 "ZXM64N02X" MSOP8 6500,10460 r90 top
R1 "Res1" CC2012-0805 3020,3780 r0 top (schematic designator R5)
R2 "Res1" CC2012-0805 3000,4990 r0 top (schematic designator R30)
R3 "Res1" CC2012-0805 3200,3780 r0 top (schematic designator R6)
R4 "0.5%" R2012-0805 3090,7680 r270 top (schematic designator R47)
R5 "Res1" CC2012-0805 3220,4040.08 r180 top (schematic designator R1)
R6 "Res1" CC2012-0805 3180,4990 r0 top (schematic designator R31)
R7 "Res1" CC2012-0805 3180,5130 r180 top (schematic designator R26)
R8 "0.5%" R2012-0805 3100,6280 r270 top (schematic designator R47)
R9 "0.5%" R2012-0805 3100,9070 r270 top (schematic designator R47)
R10 "Res1" CC2012-0805 3420.02,4770 r270 top (schematic designator R32)
R11 "Res1" CC2012-0805 3360.05,3720 r270 top (schematic designator R7)
R12 "Res1" CC2012-0805 3400,3560 r0 top (schematic designator R8)
R13 "Res1" CC2012-0805 3580,3520.06 r180 top (schematic designator R2)
R14 "Res1" CC2012-0805 3580,4810 r0 top (schematic designator R33)
R15 "Res1" CC2012-0805 3600.02,4970 r270 top (schematic designator R27)
R16 "Res1" CC2012-0805 3760,3520 r0 top (schematic designator R9)
R17 "Res1" CC2012-0805 3900,3800.07 r180 top (schematic designator R10)
R18 "Res1" CC2012-0805 3900,3940.06 r180 top (schematic designator R12)
R19 "Res1" CC2012-0805 3800,4200 r0 top (schematic designator R4)
R20 "Res1" CC2012-0805 3900,5010 r0 top (schematic designator R34)
R21 "Res1" CC2012-0805 3980,4870 r0 top (schematic designator R35)
R22 "Res1" CC2012-0805 4020,3660 r0 top (schematic designator R3)
R23 "Res1" CC2012-0805 4060.12,3880 r90 top (schematic designator R11)
R24 "Res1" CC2012-0805 4020,5150 r180 top (schematic designator R28)
R25 "Res1" CC2012-0805 4160,4710 r0 top (schematic designator R36)
R26 "Res1" CC1608-0603 4150,6230 r0 top (schematic designator R18)
R27 "Res1" CC1608-0603 4150,6330 r0 top (schematic designator R20)
R28 "Res1" CC1608-0603 4150,6430 r0 top (schematic designator R19)
R29 "Res1" CC1608-0603 4150,6530 r0 top (schematic designator R17)
R30 "Res1" CC1608-0603 4150,7680 r0 top (schematic designator R18)
R31 "Res1" CC1608-0603 4150,7780 r0 top (schematic designator R20)
R32 "Res1" CC1608-0603 4150,7880 r0 top (schematic designator R19)
R33 "Res1" CC1608-0603 4150,7980 r0 top (schematic designator R17)
R34 "Res1" CC1608-0603 4160,9010 r0 top (schematic designator R18)
R35 "Res1" CC1608-0603 4160,9110 r0 top (schematic designator R20)
R36 "Res1" CC1608-0603 4160,9210 r0 top (schematic designator R19)
R37 "Res1" CC1608-0603 4160,9310 r0 top (schematic designator R17)
R38 "Res1" CC2012-0805 4340,4710 r0 top (schematic designator R37)
R39 "Res1" CC2012-0805 4420.02,4850 r270 top (schematic designator R29)
R40 "Res1" CC2012-0805 4649.85,5780 r270 top (schematic designator R25)
R41 "Res1" CC2012-0805 4649.99,7230 r270 top (schematic designator R25)
R42 "Res1" CC2012-0805 4660,8560 r270 top (schematic designator R25)
R43 "Res1" CC2012-0805 4790.1,5780 r270 top (schematic designator R24)
R44 "Res1" CC1608-0603 4690,6210 r180 top (schematic designator R16)
R45 "Res1" CC1608-0603 4690,6310 r180 top (schematic designator R13)
R46 "Res1" CC1608-0603 4690,6410 r180 top (schematic designator R14)
R47 "Res1" CC1608-0603 4690,6510 r180 top (schematic designator R15)
R48 "Res1" CC2012-0805 4790.01,7230 r270 top (schematic designator R24)
R49 "Res1" CC1608-0603 4690,7660 r180 top (schematic designator R16)
R50 "Res1" CC1608-0603 4690,7760 r180 top (schematic designator R13)
R51 "Res1" CC1608-0603 4690,7860 r180 top (schematic designator R14)
R52 "Res1" CC1608-0603 4690,7960 r180 top (schematic designator R15)
R53 "Res1" CC2012-0805 4800,8560 r270 top (schematic designator R24)
R54 "Res1" CC1608-0603 4700,8990 r180 top (schematic designator R16)
R55 "Res1" CC1608-0603 4700,9090 r180 top (schematic designator R13)
R56 "Res1" CC1608-0603 4700,9190 r180 top (schematic designator R14)
R57 "Res1" CC1608-0603 4700,9290 r180 top (schematic designator R15)
R58 "Res1" CC2012-0805 4929.84,5780 r270 top (schematic designator R23)
R59 "Res1" CC2012-0805 4929.99,7230 r270 top (schematic designator R23)
R60 "Res1" CC2012-0805 4940,8560 r270 top (schematic designator R23)
R61 "Res1" CC2012-0805 5069.84,5780 r270 top (schematic designator R22)
R62 "Res1" CC2012-0805 5069.99,7230 r270 top (schematic designator R22)
R63 "Res1" CC2012-0805 5080,8560 r270 top (schematic designator R22)
R64 "Res1" CC2012-0805 5210.16,5780 r270 top (schematic designator R21)
R65 "Res1" CC2012-0805 5209.99,7230 r270 top (schematic designator R21)
R66 "Res1" CC2012-0805 5220,8560 r270 top (schematic designator R21)
R67 "Res1" CC2012-0805 5690,7720 r0 top (schematic designator R30)
R68 "Res1" R2012-0805 5860,9050 r0 top (schematic designator R45)
R69 "Res1" R2012-0805 5680,9170 r0 top (schematic designator R41)
R70 "0.1% 25 ppm/C Resistor" C3216-1206 5650,9800 r180 top (schematic designator R48)
R71 "Res1" CC2012-0805 5730,6200 r0 top (schematic designator R5)
R72 "Res1" CC2012-0805 5910,6200 r0 top (schematic designator R6)
R73 "0.1% 25 ppm/C Resistor" C3216-1206 5730,9580 r90 top (schematic designator R49)
R74 "Res1" CC2012-0805 5870,7720 r0 top (schematic designator R31)
R75 "Res1" CC2012-0805 5870,7860 r180 top (schematic designator R26)
R76 "Res1" R2012-0805 5860,9170 r0 top (schematic designator R43)
R77 "Res1" R2012-0805 6140,3660 r0 top (schematic designator R45)
R78 "Res1" R2012-0805 5960,3780 r0 top (schematic designator R41)
R79 "Res1" CC2012-0805 5930,6460 r180 top (schematic designator R1)
R80 "Res1" CC2012-0805 6110.01,7500 r270 top (schematic designator R32)
R81 "Res1" R2012-0805 6140,8950 r0 top (schematic designator R46)
R82 "Res1" CC1608-0603 5860,10380 r90 top (schematic designator R50)
R83 "Res1" R2012-0805 6140,3780 r0 top (schematic designator R43)
R84 "Res1" CC2012-0805 6110,5980 r0 top (schematic designator R8)
R85 "Res1" CC2012-0805 6070,6140 r270 top (schematic designator R7)
R86 "Res1" R2012-0805 6420,3560 r0 top (schematic designator R46)
R87 "Res1" CC2012-0805 6270,7540 r0 top (schematic designator R33)
R88 "Res1" R2012-0805 6420,9130 r0 top (schematic designator R44)
R89 "Res1" CC2012-0805 6290,5940 r180 top (schematic designator R2)
R90 "Res1" CC2012-0805 6290.02,7700 r270 top (schematic designator R27)
R91 "Res1" CC2012-0805 6470,5940 r0 top (schematic designator R9)
R92 "Res1" R2012-0805 6420,9250 r0 top (schematic designator R42)
R93 "Res1" R2012-0805 6700,3740 r0 top (schematic designator R44)
R94 "Res1" CC2012-0805 6610,6220 r180 top (schematic designator R10)
R95 "Res1" CC2012-0805 6610,6360 r180 top (schematic designator R12)
R96 "Res1" CC2012-0805 6510,6620 r0 top (schematic designator R4)
R97 "Res1" CC2012-0805 6590,7740 r0 top (schematic designator R34)
R98 "Res1" CC2012-0805 6670,7600 r0 top (schematic designator R35)
R99 "Res1" R2012-0805 6600,9250 r0 top (schematic designator R39)
R100 "Res1" R2012-0805 6700,3860 r0 top (schematic designator R42)
R101 "Res1" CC2012-0805 6730,6080 r0 top (schematic designator R3)
R102 "Res1" CC2012-0805 6710,7880 r180 top (schematic designator R28)
R103 "Res1" R2012-0805 6780,9250 r0 top (schematic designator R40)
R104 "Res1" R2012-0805 6880,3860 r0 top (schematic designator R39)
R105 "Res1" CC2012-0805 6770,6300 r90 top (schematic designator R11)
R106 "Res1" CC2012-0805 6850,7440 r0 top (schematic designator R36)
R107 "Res1" CC2012-0805 7030,7440.03 r0 top (schematic designator R37)
R108 "Res1" R2012-0805 7060,3860 r0 top (schematic designator R40)
R109 "Res1" CC2012-0805 7110.01,7580 r270 top (schematic designator R29)
R110 "Res1" R2012-0805 7080,9100 r270 top (schematic designator R38)
R111 "Res1" R2012-0805 7360,3710 r270 top (schematic designator R38)
U1 "AD8221AR" SO-G8 3320,6280 r270 top (schematic designator U9)
U2 "AD8221AR" SO-G8 3310,7680 r270 top (schematic designator U9)
U3 "AD8221AR" SO-G8 3320,9070 r270 top (schematic designator U9)
U4 "AD8028ARM" TSSO3x5-G10 3400,4970 r270 top (schematic designator U5)
U5 "AD8513 ARU" TSSO5X6-G14/X.3 3600,3840 r270 top (schematic designator U1)
U6 "AD8028ARM" TSSO3x5-G10 4220,4850 r270 top
U7 "ADG659YRU" TSSO5X6-G16 4410,6370 r270 top (schematic designator U2)
U8 "ADG659YRU" TSSO5X6-G16 4410,7820 r270 top (schematic designator U2)
U9 "ADG659YRU" TSSO5X6-G16 4420,9150 r270 top (schematic designator U2)
U10 "OPA227UA" SO-G8/D5.1 4970,6350 r270 top (schematic designator U4)
U11 "OPA227UA" SO-G8/D5.1 4970,7800 r270 top (schematic designator U4)
U12 "OPA227UA" SO-G8/D5.1 4980,9130 r270 top (schematic designator U4)
U13 "LTC6910-1" TSOT-23-8 5230,6390 r0 top (schematic designator U3)
U14 "LTC6910-1" TSOT-23-8 5230,7840 r0 top (schematic designator U3)
U15 "LTC6910-1" TSOT-23-8 5240,9170 r0 top (schematic designator U3)
U16 "LT1790ACS6-1.25" "LTI SOT-23 ThinSOT" 5470,9660 r0 top (schematic designator U11)
U17 "OPA227UA" SO-G8/D5.1 6030,9640 r270 top (schematic designator U10)
U18 "AD8028ARM" TSSO3x5-G10 6090,7700 r270 top (schematic designator U5)
U19 "LTC1563-3" SSO-G16/X.4 6140,9150 r270 top (schematic designator U8)
U20 "3.3 Switching" "PWP PowerPad - 16" 6200,10520 r0 top (schematic designator U12)
U21 "AD8513 ARU" TSSO5X6-G14/X.3 6310,6260 r270 top (schematic designator U1)
U22 "LTC1563-3" SSO-G16/X.4 6420,3760 r270 top (schematic designator U8)
U23 "AD8519" SO-G8/X.6 6840,9070 r270 top (schematic designator U7)
U24 "AD8028ARM" TSSO3x5-G10 6910,7580 r270 top (schematic designator U6)
U25 "AD8519" SO-G8/X.6 7120,3680 r270 top (schematic designator U7)

## Footprints (in the part's own frame and the unit in brackets; to place one, negate y for a bottom-side part, rotate by r counter-clockwise, add the part's x,y. Pads: shape width x height; smd on the part's side, far side on the other; paste and mask are expansions set on the pad)
C3216-1206 [mm]
  rect 1.6x1.8 smd: 1(-1.4,0) 2(1.4,0)
  silkscreen extent -2.6,-1.3 2.6,1.3
CC1608-0603 [mm]
  rect 1.1x1 smd: 1(-0.85,0) 2(0.85,0)
  silkscreen extent -1.8,-1.2 1.8,1.2
CC2012-0805 [mm]
  rect 1.3x1.5 smd: 1(-0.95,0) 2(0.95,0)
  silkscreen extent -2,-1.65 2,1.64
CC3216-1206 [mm]
  rect 1.6x1.8 smd: 1(-1.4,0) 2(1.4,0)
  silkscreen extent -2.6,-1.6 2.6,1.6
CC3225-1210 [mm]
  rect 1.6x2.7 smd: 1(-1.4,0) 2(1.4,0)
  silkscreen extent -2.6,-2.03 2.6,2.05
HDR1X2 [mm]
  rect 1.5x1.5 hole 0.9: 1(0,0)
  round 1.5 hole 0.9: 2(2.54,0)
  silkscreen extent -1.27,-1.27 3.81,1.27
HDR1X3 [mm]
  rect 1.5x1.5 hole 0.9: 1(0,0)
  round 1.5 hole 0.9: 2(2.54,0) 3(5.08,0)
  silkscreen extent -1.27,-1.27 6.35,1.27
HDR2X5 [mm]
  rect 1.5x1.5 hole 0.9: 1(0,0)
  round 1.5 hole 0.9: 2(0,2.54) 3(2.54,0) 4(2.54,2.54) 5(5.08,0) 6(5.08,2.54) 7(7.62,0) 8(7.62,2.54) 9(10.16,0) 10(10.16,2.54)
  silkscreen extent -1.27,-1.27 11.43,3.81
"LTI SOT-23 ThinSOT" [mm]
  rect 1x0.6 smd: 1(0,0) 2(0,-0.95) 3(0,-1.9) 4(2.8,-1.9) 5(2.8,-0.95) 6(2.8,0)
  silkscreen extent 0.84,-2.39 1.96,0.48
MJ4RTHR [mm]
  round 4 hole 3.2: 0(-8.4,-7.3) 0(4.2,-7.3)
  round 2.2 hole 1.8: 1(4.2,0) 2(0,0) 3(-4.2,0) 4(-8.4,0)
  silkscreen extent -11.1,-14.2 6.9,-1.9
MSOP8 [mm]
  rect 1.04x0.38 smd: 1(0,0)
  oval 1.04x0.38 smd: 2(0,-0.65) 3(0,-1.3) 4(0,-1.95) 5(4.24,-1.95) 6(4.24,-1.3) 7(4.24,-0.65) 8(4.24,0)
  silkscreen extent 1.25,-2.28 2.99,0.33
NC3FAH-0 [mil] "Neutrik 3 pole female XLR receptacle, plastic housing, horizontal PCB mount."
  round 75 hole 65: 0(-150,-150) 0(150,-350) 1(-150,-500) 2(150,-525)
  round 75 hole 50: 3(0,-675)
  silkscreen extent -500,-825 500,0
PanasonicE [mm]
  rect 3.6x0.8 smd: 1(3,0) 2(-3,0)
  silkscreen extent -4.6,-4.1 4.6,4.2
"PWP PowerPad - 16" [mil]
  rect 60x15 smd: 1(-115,89.4) 2(-115,63.8) 3(-115,38.2) 4(-115,12.6) 5(-115,-13) 6(-115,-38.6) 7(-115,-64.2) 8(-115,-89.8) 9(115,-89.8) 10(115,-64.2) 11(115,-38.6) 12(115,-13) 13(115,12.6) 14(115,38.2) 15(115,63.8) 16(115,89.4)
  rect 62x101 smd paste+0 mask+0: P0(0,0)
  round 20 hole 18 mask-20: P1(40,105) P2(-40,105) P3(40,-100) P4(-40,-100)
  round 20 hole 13.5 mask-20: P5(-20,40) P6(-20,0) P7(-20,-40) P8(20,40) P9(20,0) P10(20,-40)
  rect 36x256 smd mask+0: P11(49,0) p12(-49,0)
  rect 62x77.5 smd mask+0: p16(0,-89) p17(0,89)
  silkscreen extent -75,-140 75,140
R2012-0805 [mm]
  rect 1.3x1.5 smd: 1(-0.95,0) 2(0.95,0)
  silkscreen extent -2,-1.15 2,1.15
"SFX-POWER 39-28-1243" [mm] "Molex Power connector for SFX PSU part 39-28-1243"
  round 2.2 hole 1.8: 1(0,0) 2(4.2,0) 3(8.4,0) 4(12.6,0) 5(16.8,0) 6(21,0) 7(25.2,0) 8(29.4,0) 9(33.6,0) 10(37.8,0) 11(42,0) 12(46.2,0) 13(0,-5.5) 14(4.2,-5.5) 15(8.4,-5.5) 16(12.6,-5.5) 17(16.8,-5.5) 18(21,-5.5) 19(25.2,-5.5) 20(29.4,-5.5) 21(33.6,-5.5) 22(37.8,-5.5) 23(42,-5.5) 24(46.2,-5.5)
  silkscreen extent -4,-11.11 50,5
SO-G8 [mm]
  rect 0.6x2.2 smd: 1(-1.905,-2.6) 2(-0.635,-2.6) 3(0.635,-2.6) 4(1.905,-2.6) 5(1.905,2.6) 6(0.635,2.6) 7(-0.635,2.6) 8(-1.905,2.6)
  silkscreen extent -2.88,-2.72 2.5,1.1
SO-G8/D5.1 [mm]
  rect 0.6x1.4 smd: 1(-1.905,-2.95) 2(-0.635,-2.95) 3(0.635,-2.95) 4(1.905,-2.95) 5(1.905,2.95) 6(0.635,2.95) 7(-0.635,2.95) 8(-1.905,2.95)
  silkscreen extent -2.88,-3.07 2.55,1.85
SO-G8/X.6 [mm]
  rect 0.6x1.55 smd: 1(-1.905,-2.925) 2(-0.635,-2.925) 3(0.635,-2.925) 4(1.905,-2.925) 5(1.905,2.925) 6(0.635,2.925) 7(-0.635,2.925) 8(-1.905,2.925)
  silkscreen extent -2.88,-3.05 2.5,1.75
SSO-G16/X.4 [mm]
  rect 0.4x2.15 smd: 1(-2.275,-3.275) 2(-1.625,-3.275) 3(-0.975,-3.275) 4(-0.325,-3.275) 5(0.325,-3.275) 6(0.975,-3.275) 7(1.625,-3.275) 8(2.275,-3.275) 9(2.275,3.275) 10(1.625,3.275) 11(0.975,3.275) 12(0.325,3.275) 13(-0.325,3.275) 14(-0.975,3.275) 15(-1.625,3.275) 16(-2.275,3.275)
  silkscreen extent -3.25,-3.4 3.25,1.8
STEWARD_1SR [mil]
  rect 124x136 smd: 1(-169,0) 2(169,0)
  silkscreen extent -263,-100 263,100
"SUMIDA Inductor" [mm] "Sumida inductor format"
  rect 5x3 smd: 1(0,4.9) 2(0,-4.9)
  silkscreen extent -6.35,-6.03 6.03,6.03
TC3216-1206 [mm]
  rect 2x1.2 smd: 1(-1.4,0) 2(1.4,0)
  silkscreen extent -2.8,-1 2.3,1
TC7360-2924 [mm]
  rect 2.6x4.1 smd: 1(-3.2,0) 2(3.2,0)
  silkscreen extent -4.9,-2.45 4.4,2.45
TSOT-23-8 [mm]
  rect 1.22x0.43 smd: 1(0,0)
  oval 1.22x0.43 smd: 2(0,-0.65) 3(0,-1.3) 4(0,-1.95) 5(2.62,-1.95) 6(2.62,-1.3) 7(2.62,-0.65) 8(2.62,0)
  silkscreen extent 0.9,-2.35 1.75,0.25
TSSO3x5-G10 [mm]
  rect 0.3x1.6 smd: 1(-1,-2.05) 2(-0.5,-2.05) 3(0,-2.05) 4(0.5,-2.05) 5(1,-2.05) 6(1,2.05) 7(0.5,2.05) 8(0,2.05) 9(-0.5,2.05) 10(-1,2.05)
  silkscreen extent -1.82,-2.17 1.58,0.85
TSSO5X6-G14/X.3 [mm]
  rect 0.3x1.65 smd: 1(-1.95,-2.775) 2(-1.3,-2.775) 3(-0.65,-2.775) 4(0,-2.775) 5(0.65,-2.775) 6(1.3,-2.775) 7(1.95,-2.775) 8(1.95,2.775) 9(1.3,2.775) 10(0.65,2.775) 11(0,2.775) 12(-0.65,2.775) 13(-1.3,2.775) 14(-1.95,2.775)
  silkscreen extent -2.77,-2.9 2.55,1.55
TSSO5X6-G16 [mm]
  rect 0.3x1.65 smd: 1(-2.275,-2.775) 2(-1.625,-2.775) 3(-0.975,-2.775) 4(-0.325,-2.775) 5(0.325,-2.775) 6(0.975,-2.775) 7(1.625,-2.775) 8(2.275,-2.775) 9(2.275,2.775) 10(1.625,2.775) 11(0.975,2.775) 12(0.325,2.775) 13(-0.325,2.775) 14(-0.975,2.775) 15(-1.625,2.775) 16(-2.275,2.775)
  silkscreen extent -3.1,-2.9 2.55,1.55
"Vertical BNC 227699-1" [mil] "AMP vertical BNC 227699-1"
  round 70 hole 52: 1(0,0) 2(250,250) 3(-250,250) 4(-250,-250) 5(250,-250)
  silkscreen extent -345,-345 345,345

## Part data
C1 C2 C3 C4 C5 C12 C13 C18 C19 C20 C21 C22 C23 C24 C25 C26 C27 C28 C29 C30 C31 C32 C33 C34 C36 C44 C45 C46 C47 C49 C50 C51 C56 C57 C61 C62 C63 C64 C65 C66 C67 C68 C69 C70 C71 C72 C74 C75 C76 C79 C80 C81 C82 C83 C84 C85 C86 C87 C88 C89 C90 C91 C92 C93 C94 C95 C96 C97 C98 C99 C100 C101 C102 C103 C104 C105 C106 C107 C108 C109 C110 C111 C112 C113 C114 C115 C116: "Capacitor"
C6 C7 C11 C14 C35 C37 C53 C54 C55 C58 C73 C77: "Polarized Capacitor (Radial)"
C8 C9 C10 C15 C16 C17: "Polarized Capacitor (Surface Mount)"
C38 C39 C40 C41 C42 C43: library part Cap2, "Capacitor"
C48: library part "Cap Pol1", "Input Bulk Cap"
C52: library part Cap, "Input Bypass Cap"
C59 C60: library part "Cap Pol3", "Polarized Capacitor (Surface Mount)"
C78: library part "Cap Pol1", "Polarized Capacitor (Radial)"
J1 J2 J3: library part XLR, "XLR balanced connector, standard"
J4 J5 J6 J7 J8 J9 J10 J11 J12 J13 J14 J15 J16 J17 J18: library part VERTBNC, "Vertical BNC with correct grounding pin behavior"
JP1 JP2 JP4 JP5 JP6 JP12 JP13 JP14 JP15: "Header, 2-Pin"
JP3: "Header, 24-Pin"
JP7 JP8 JP16 JP17: "Header, 3-Pin"
JP9 JP10 JP11: "Header, 5-Pin, Dual row"
L1 L2: library part Inductor, "Inductor"
L3: library part "Inductor Iron", "Magnetic-Core Inductor"
POWER-A1: library part "Header 4", "Header, 4-Pin"
Q1: library part "N-CHAN ENH MOSFET"
R1 R2 R3 R5 R6 R7 R10 R11 R12 R13 R14 R15 R16 R17 R18 R19 R20 R21 R22 R23 R24 R25 R26 R27 R28 R29 R30 R31 R32 R33 R34 R35 R36 R37 R38 R39 R40 R41 R42 R43 R44 R45 R46 R47 R48 R49 R50 R51 R52 R53 R54 R55 R56 R57 R58 R59 R60 R61 R62 R63 R64 R65 R66 R67 R68 R69 R71 R72 R74 R75 R76 R77 R78 R79 R80 R81 R82 R83 R84 R85 R86 R87 R88 R89 R90 R91 R92 R93 R94 R95 R96 R97 R98 R99 R100 R101 R102 R103 R104 R105 R106 R107 R108 R109 R110 R111: "Resistor"
R4 R8 R9: library part Res1, "RR1220P-4990-D-M"
R70 R73: library part Res1, "Resistor"
U1 U2 U3: library part AD8221, "AD8221 Precision Instrumentation Amplifier"
U4 U6 U18 U24: "Analog Devices Low Distortion, High Speed RRIO OA"
U5 U21: library part AD8513ARU, "low-noise JFET quad OA"
U7 U8 U9: library part ADG659, "ADG659 4:1 Differential +/- 5V Mux"
U13 U14 U15: library part LTC6910-2, "LTI Digitally Controlled Programmabe Gain Amp"
U16: library part LT1790
U19 U22: "Linear Tech 4-th order linear continuous filter"
U20: library part TPS54356, "TI 3A 3.3V out switching Regulator"
U23 U25: "8 MHz RRIO Op-Amp"

## Free pads (board coordinates)
  round 60 hole 42: 0(4990,8950) 1(3680,6260) 1(3700,7640) 1(3760,9100) 1(4980,6140) 1(5000,7600)
  round 160 hole 140: 0(7660,11260) 1(7552,3460) 2(2320,3272) 3(2240,11200)
  round 86.61 hole 70.87: 2(7560,10690) 3(7024,10140)
  round 86.61 hole 40: 4(6592,10260) 5(6240,10890)

## Via types
v1: diameter 25, hole 13.5, Top Layer to Bottom Layer, 178 vias
v2: diameter 35, hole 20, Top Layer to Bottom Layer, 60 vias

## Nets (pads, with @x,y where several pads share a name; then routed paths per layer and width w, separated by ;. In a path a pad name is that pad's centre, name@x,y a point inside that pad or via, vN(x,y) a via of type N, cw(c..) or ccw(c..) an arc to the next point about the centre after c; other vN are vias at no path point)
+12VCC: C48.1 C52.1 JP3.10 JP3.11 U20.1 U20.2
AVDD: C10.1 C11.1 C14.1 C15.1 C17.1 C35.1 C39.1 C41.1 C43.1 C53.1 C58.1 C59.1 C73.1 C80.2 C82.1 C84.1 C86.1 C87.2 C90.2 C94.2 C95.2 C96.2 C98.1 C100.1 C102.1 C105.2 C107.2 C108.2 C110.2 C113.2 C114.2 C116.2 JP1.1 JP2.1 JP4.1 JP5.1 JP12.1 JP13.1 JP14.1 JP15.1 L1.2 R40.2 R41.2 R42.2 R43.2 R48.2 R53.2 R58.2 R59.2 R60.2 R61.2 R62.2 R63.2 R64.2 R65.2 R66.2 U1.8 U2.8 U3.8 U4.10 U5.4 U6.10 U7.16 U8.16 U9.16 U10.7 U11.7 U12.7 U13.8 U14.8 U15.8 U16.4 U17.7 U18.10 U19.16 U21.4 U22.16 U23.7 U24.10 U25.7 | length 5997.1
  Top Layer w10: v1(3430,3820) 3450,3840 U5.4@3490.75,3840 ; U4.10@3480.71,5009.37 v1(3480.71,5049.29) ; v1(4300,4920) 4300.71,4919.29 U6.10@4300.71,4889.37 ; v2(4460,6490) 4490.43,6459.57 U7.16@4519.25,6459.57 ; v2(4460,7940) 4490.43,7909.57 U8.16@4519.25,7909.57 ; v2(4470,9270) 4500.43,9239.57 U9.16@4529.25,9239.57 ; R40.2@4650,5742.6 R64.2@5210,5742.6 ; R41.2@4649.99,7192.6 R65.2@5209.99,7192.6 ; R42.2@4660,8522.6 R66.2@5220,8522.6 ; v2(5140,5740) v2@5140,5742.6 ; v2(5140,7190) v2@5140,7192.6 ; v2(5150,8520) v2@5150,8522.6 ; C39.1@5325.12,6470 5325.12,6444.88 v2(5350,6420) 5333.15,6403.15 U13.8@5333.15,6390 ; C41.1@5325.12,7920 5325.12,7894.88 v2(5350,7870) 5333.15,7853.15 U14.8@5333.15,7840 ; C43.1@5335.12,9250 5335.12,9224.88 v2(5360,9200) 5343.15,9183.15 U15.8@5343.15,9170 ; v1(6140,6240) 6160,6260 U21.4@6200.75,6260 ; U18.10@6170.71,7739.37 v1(6170.71,7779.29) ; v1(6990,7650) 6990.71,7649.29 U24.10@6990.71,7619.37
  Top Layer w16: U2.8@3412.36,7755 3412.36,7782.36 3454.88,7824.88 C10.1@3454.88,7860 ; U1.8@3422.36,6355 3422.36,6382.36 3464.88,6424.88 C15.1@3464.88,6460 ; U3.8@3422.36,9145 3422.36,9172.36 3464.88,9214.88 C17.1@3464.88,9250 ; U10.7@5086.14,6375 5115,6375 v2(5140,6400) ; U11.7@5086.14,7825 5115,7825 v2(5140,7850) ; U12.7@5096.14,9155 5125,9155 v2(5150,9180) ; v1(5580.24,9540.24) U16.4@5580.24,9585.2 ; U17.7@6146.14,9665 v1(6205,9665) ; U19.16@6268.94,9239.57 6268.94,9268.94 v1(6280,9280) ; U22.16@6548.94,3849.57 6548.94,3878.94 v1(6560,3890) ; v1(6900,9110) 6915,9095 U23.7@6955.16,9095 ; v1(7180,3720) 7195,3705 U25.7@7235.16,3705
  Top Layer w20: v1(3440,3340) C11.1@3524.02,3340 ; v1(3480,5190) C14.1@3554.02,5190 ; v1(3480.71,5049.29) 3480.71,5080.71 C14.1@3550,5150 ; v1(4190,5190) C35.1@4274.02,5190 v1(4274.02,5084.02) ; v1(6060,5760) C53.1@6144.02,5760 ; v1(6170,7920) C58.1@6244.02,7920 ; v1(6170.71,7779.29) 6170.71,7810.71 C58.1@6240,7880 ; v1(6880,7920) C73.1@6964.02,7920 v1(6964.02,7814.02)
  Top Layer w30: C59.1@6420,4698.11 6681.89,4960 L1.2@6780,4960 ; v1(6750,4870) L1.2@6750,4980 ; L1.2@6771,4980 v1(6771,5099)
  Bottom Layer w16: C84.1@3390,7806.54 3423.46,7806.54 v2(3430,7800) ; C82.1@3400,6406.54 3433.46,6406.54 v2(3440,6400) ; C86.1@3400,9196.54 3433.46,9196.54 v2(3440,9190) ; v1(3430,3820) 3443.47,3806.53 C87.2@3490.75,3806.53 ; C80.2@3480,5003.46 v1@3480,5048.58 ; C90.2@4260,4896.54 4276.54,4896.54 v1(4300,4920) ; C94.2@5090,6396.54 5093.46,6400 v2(5140,6400) ; C95.2@5090,7846.54 5093.46,7850 v2(5140,7850) ; C96.2@5100,9176.54 5103.46,9180 v2(5150,9180) ; C98.1@5303.46,6430 5313.46,6420 v2(5350,6420) ; C100.1@5303.46,7880 5313.46,7870 v2(5350,7870) ; C102.1@5313.46,9210 5323.46,9200 v2(5360,9200) ; v1(6140,6240) 6153.47,6226.53 C107.2@6200.75,6226.53 ; C105.2@6170,7733.46 v1@6170,7778.58 ; C108.2@6280,9223.46 v1(6280,9280) ; C110.2@6560,3833.46 v1(6560,3890) ; v1(6900,9110) 6956.54,9110 C114.2@6960,9113.46 ; C113.2@6950,7626.54 6966.54,7626.54 v1(6990,7650) ; v1(7180,3720) 7236.54,3720 C116.2@7240,3723.46
AVSS: C6.2 C7.2 C8.2 C9.2 C16.2 C37.2 C38.2 C40.2 C42.2 C54.2 C55.2 C60.2 C77.2 C79.1 C81.1 C83.1 C85.1 C88.1 C89.1 C91.2 C92.2 C93.2 C97.2 C99.2 C101.2 C103.2 C104.1 C106.2 C109.1 C111.2 C112.1 C115.2 L2.2 U1.5 U2.5 U3.5 U4.4 U5.11 U6.4 U7.7 U8.7 U9.7 U10.4 U11.4 U12.4 U13.4 U14.4 U15.4 U17.4 U18.4 U19.8 U21.11 U22.8 U23.4 U24.4 U25.4 | length 4061
  Top Layer w10: v1(3260,4930) 3280.32,4950.31 U4.4@3319.29,4950.31 ; U5.11@3709.25,3840 v1(3760,3840) ; v1(4070,4800) 4100,4830 U6.4@4150,4830 ; U7.7@4300.75,6306.02 4343.98,6306.02 v2(4370,6280) ; U8.7@4300.75,7756.02 4343.98,7756.02 v2(4370,7730) ; U9.7@4310.75,9086.02 4353.98,9086.02 v2(4380,9060) ; C38.2@5214.88,6230 5214.88,6274.88 v1(5230,6290) U13.4@5230,6313.23 ; C40.2@5214.88,7680 5214.88,7724.88 v1(5230,7740) U14.4@5230,7763.23 ; C42.2@5224.88,9010 5224.88,9054.88 v1(5240,9070) U15.4@5240,9093.23 ; v1(5950,7660) 5970.31,7680.31 U18.4@6009.29,7680.31 ; U21.11@6419.25,6260 v1(6470,6260) ; v1(6760,7530) 6790,7560 U24.4@6840,7560
  Top Layer w16: U2.5@3412.36,7605 3412.36,7587.64 v2(3434.88,7565.12) C9.2@3434.88,7520 ; U1.5@3422.36,6205 3422.36,6187.64 v2(3444.88,6165.12) C8.2@3444.88,6120 ; U3.5@3422.36,8995 3422.36,8977.64 v2(3444.88,8955.12) C16.2@3444.88,8910 ; U10.4@4853.86,6275 4865,6275 v2(4900,6240) ; U11.4@4853.86,7725 4865,7725 v2(4900,7690) ; U12.4@4863.86,9055 4875,9055 v2(4910,9020) ; U17.4@5920,9570 v1(5980,9570) ; v1(6011.06,9031.06) U19.8@6011.06,9060.43 ; v1(6291.06,3641.06) U22.8@6291.06,3670.43 ; v1(6700,8960) 6700,8970.16 U23.4@6724.84,8995 ; v1(6980,3570) 6980,3580.16 U25.4@7004.84,3605
  Top Layer w20: v1(3625.98,4025.98) v1(3625.98,4225.98) ; C7.2@3665.98,4490 v1(3750,4490) ; v1(4620,5070) C37.2@4620,4995.98 v1(4734.02,4995.98) ; v1(6335.98,6445.98) v1(6335.98,6645.98) ; C55.2@6355.98,7220 v1(6440,7220) ; v1(7310,7800) C77.2@7310,7725.98 v1(7424.02,7725.98)
  Top Layer w30: C60.2@6390,5450 6400,5440 L2.2@6771,5440 v1(6771,5341)
  Bottom Layer w16: v1(3260,4930) 3266.54,4936.54 C79.1@3320,4936.54 ; C83.1@3390,7573.46 3426.54,7573.46 v2(3434.88,7565.12) ; C81.1@3400,6173.46 3436.54,6173.46 v2(3444.88,6165.12) ; C85.1@3400,8963.46 3436.54,8963.46 v2(3444.88,8955.12) ; C88.1@3700,3873.46 3726.54,3873.46 v1(3760,3840) ; v1(4070,4800) C89.1@4116.54,4800 ; C91.2@4850,6263.46 4876.54,6263.46 v2(4900,6240) ; C92.2@4850,7713.46 4876.54,7713.46 v2(4900,7690) ; C93.2@4860,9043.46 4886.54,9043.46 v2(4910,9020) ; v1(5230,6290) 5236.54,6283.46 C97.2@5236.54,6250 ; v1(5230,7740) 5236.54,7733.46 C99.2@5236.54,7700 ; v1(5240,9070) 5246.54,9063.46 C101.2@5246.54,9030 ; v1(5950,7660) 5956.54,7666.54 C104.1@6010,7666.54 ; C103.2@6000,9076.54 6000,9042.13 v1(6011.06,9031.06) ; C106.2@6280,3686.54 6280,3652.13 v1(6291.06,3641.06) ; C109.1@6410,6293.46 6436.54,6293.46 v1(6470,6260) ; v1(6700,8960) 6720,8980 C111.2@6746.54,8980 ; v1(6760,7530) C112.1@6806.54,7530 ; v1(6980,3570) 7000,3590 C115.2@7026.54,3590
  other v1: 6490,5440